# EAGLE board Laptimer (EAGLE 6.3)
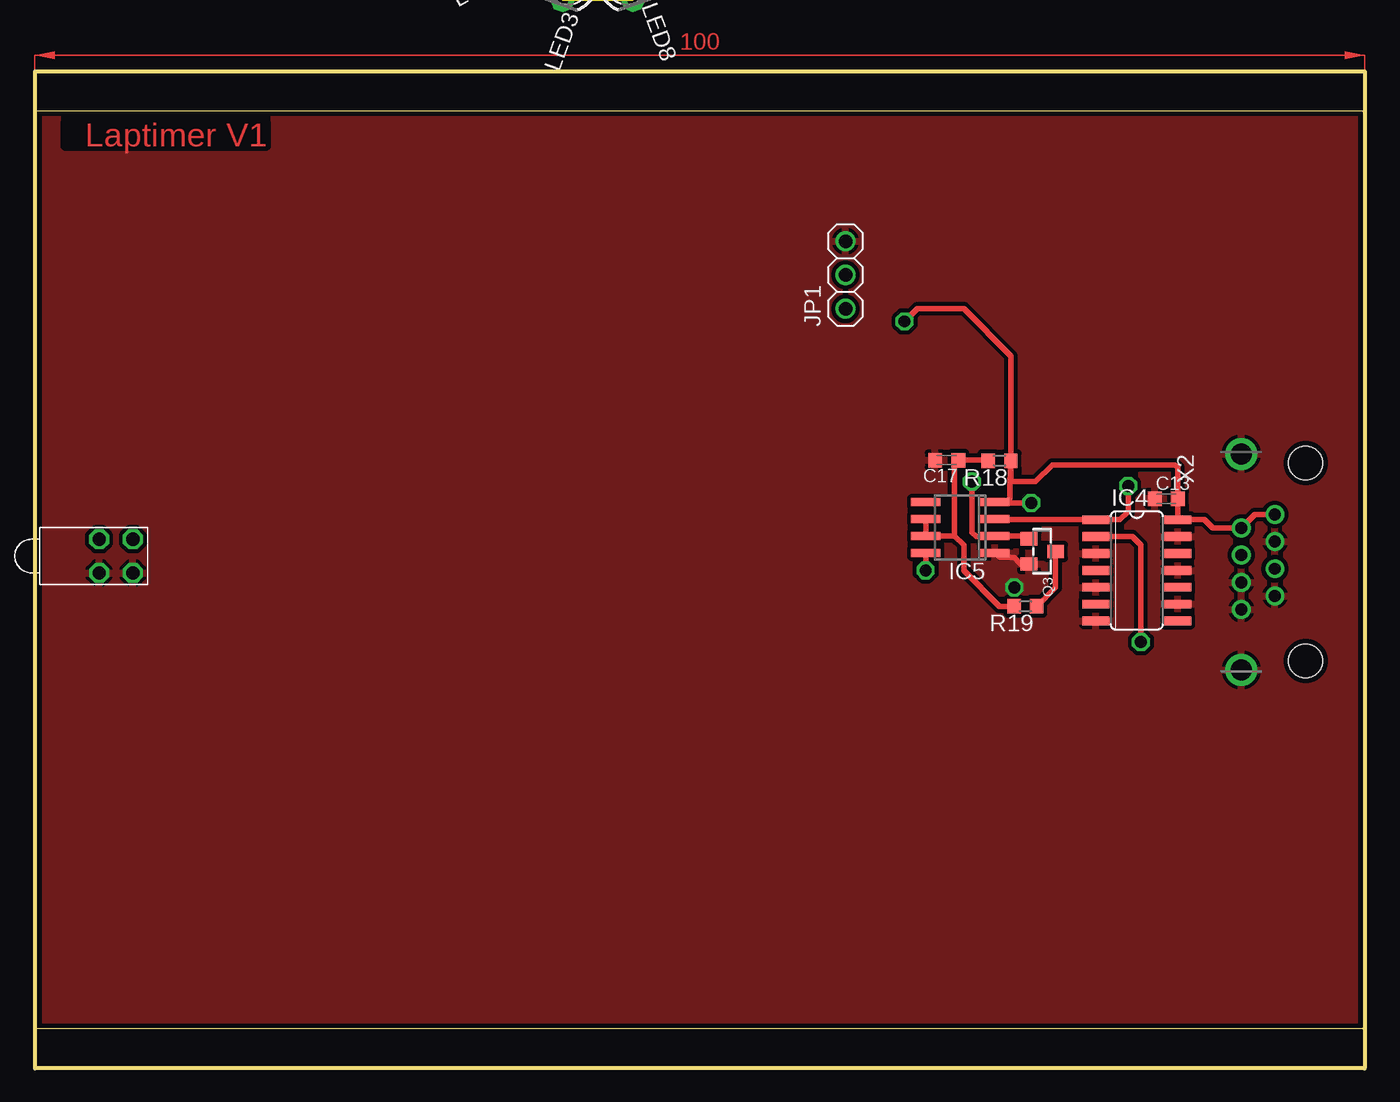
[diagram p0: board, top side]
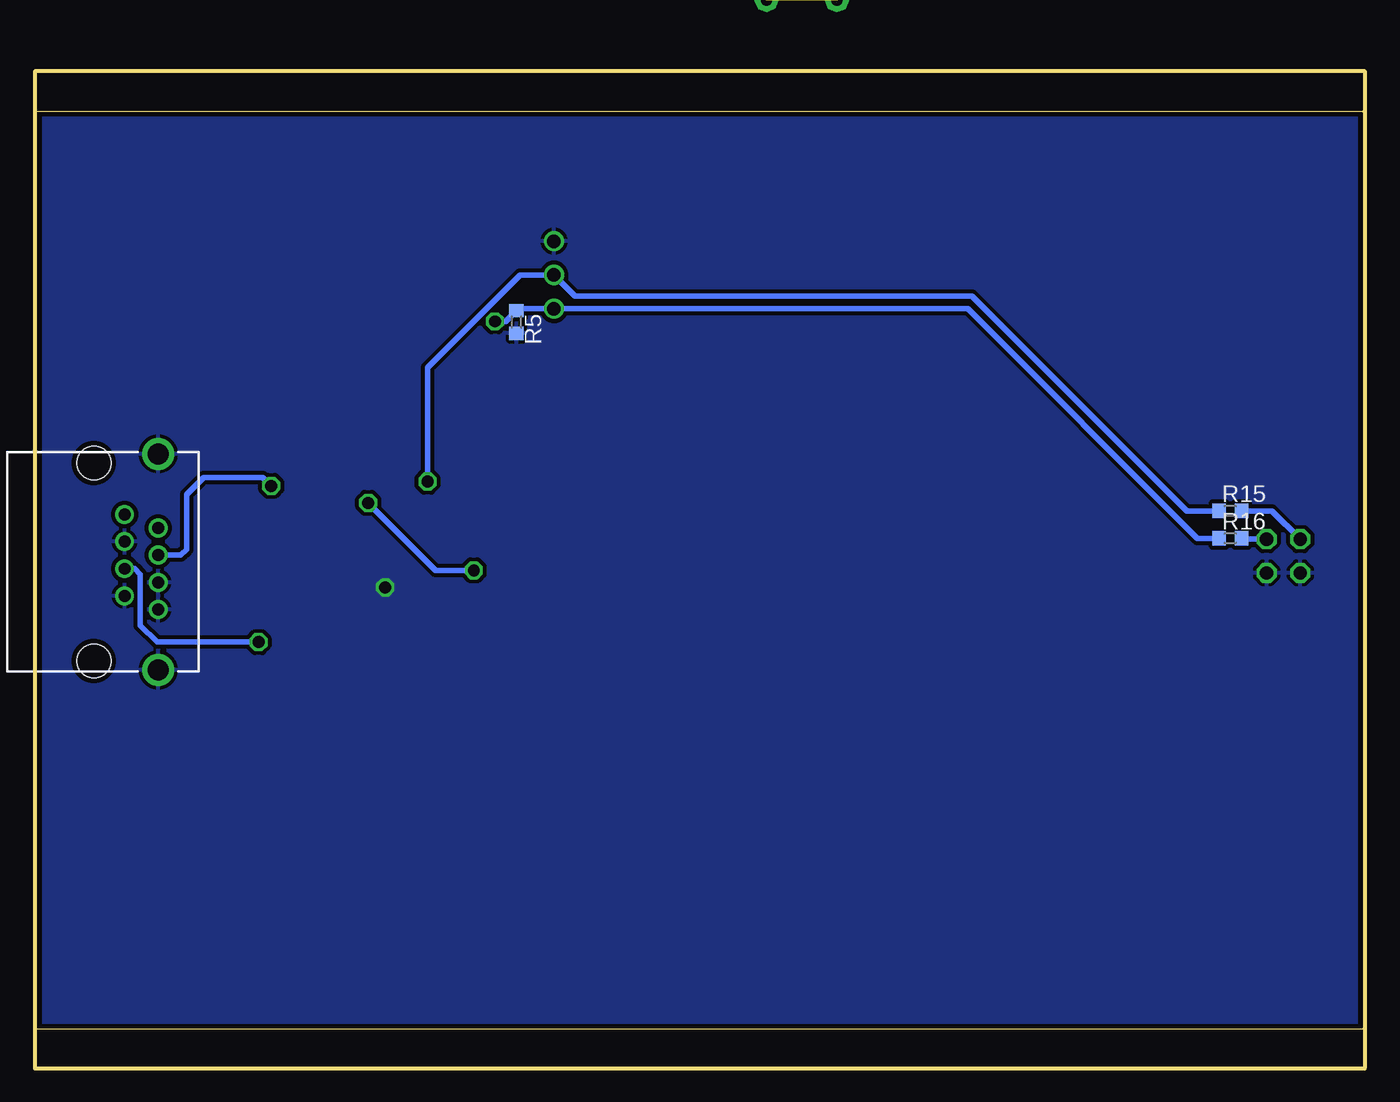
[diagram p1: board, bottom side, seen from below]

Size 100.09 x 75 mm. Coordinates in mm from the lower left corner, seen from the top.
Outline: 0,72 0,75 100,75 100,72
Outline: 0,72 0,3
Outline: 0,3 0,0 100,0 100,3
Outline: 100,72 100,3
Outline: 100,3 0,3
Outline: 100,72 0,72
Copper layers (1*16): Top 0.0356mm / dielectric 1.5011mm / Bottom 0.0356mm
Design rules "LaenPCBOrder *": minimum track width 6mil, minimum drill 13mil, track to track 12mil, track to pad 12mil, pad to pad 12mil, via to via 12mil, smd to smd 12mil, copper to edge 15mil, drill to drill 6mil, minimum pad ring 7mil, minimum via ring 7mil, stop-mask expansion 3mil, vias tented up to drill 0mil, thermal gap 10mil
Holes 9 mm at 42.32,87.94
Holes 0.6 mm at 42.32,87.94

## Footprints (pad centres in the part's own frame; a part is rotated, then mirrored left to right if it is on the bottom)
C0603K = smd 1.05 x 1.08: 1 -0.875,0; 2 0.875,0
SO14 = smd 0.66 x 2.032: 1 -3.81,-3.073; 2 -2.54,-3.073; 3 -1.27,-3.073; 4 0,-3.073; 5 1.27,-3.073; 6 2.54,-3.073; 7 3.81,-3.073; 8 3.81,3.073; 9 2.54,3.073; 10 1.27,3.073; 11 0,3.073; 12 -1.27,3.073; 13 -2.54,3.073; 14 -3.81,3.073
SO08 = smd 0.6 x 2.2: 1 -1.905,-2.6; 2 -0.635,-2.6; 3 0.635,-2.6; 4 1.905,-2.6; 5 1.905,2.6; 6 0.635,2.6; 7 -0.635,2.6; 8 -1.905,2.6
1X03 = drill 1.016: 1 -2.54,0; 2 0,0; 3 2.54,0
1X02_ROUND = drill 1 pad 1.676: 1 -1.27,0; 2 1.27,0
LED3MM = drill 0.813 pad 1.676 octagon: A -1.27,0; K 1.27,0
SOT23-WIDE = smd 1 x 1.27: 1 -0.95,-1; 2 0.95,-1; 3 0,1
R0603 = smd 1 x 1.1: 1 -0.85,0; 2 0.85,0
BI-LEVEL-LED-INDICATOR = drill 1 octagon: ANODE1 1.27,1.27; ANODE2 1.27,-1.27; CATHODE1 -1.27,1.27; CATHODE2 -1.27,-1.27
GLX-S-88M = drill 0.9 pad 1.422: 1 -3.57,-2.3; 2 -2.55,-4.84; 3 -1.53,-2.3; 4 -0.51,-4.84; 5 0.51,-2.3; 6 1.53,-4.84; 7 2.55,-2.3; 8 3.57,-4.84 | drill 1.6 pad 2.184: S1 -8.125,-4.84; S2 8.125,-4.84 | hole 2.55: -7.44,0; 7.44,0

## Placement (x,y rotation side)
C13  100n  [C0603K]  85.09,42.86 0 top
C17  100n  [C0603K]  68.58,45.76 180 top
IC4  74HC04D  [SO14]  82.87,37.47 270 top
IC5  NE555D  [SO08]  69.6,40.7 90 top
JP1  [1X03]  60.96,59.69 90 top
JP2  [1X02_ROUND]  52.7,86.36 270 top  (outside the outline)
JP3  [1X03]  55.24,86.36 270 top  (outside the outline)
LED1  SFH 309  [LED3MM]  35.6,89.22 170 top  (outside the outline)
LED2  SFH 309  [LED3MM]  42.32,94.67 90 top  (outside the outline)
LED3  SFH 309  [LED3MM]  40.1,81.53 250 top  (outside the outline)
LED4  SFH 309  [LED3MM]  48.1,84.44 330 top  (outside the outline)
LED5  SFH 309  [LED3MM]  48.99,89.22 10 top  (outside the outline)
LED6  SFH 309  [LED3MM]  38.16,93.34 130 top  (outside the outline)
LED7  SFH 309  [LED3MM]  36.59,84.43 210 top  (outside the outline)
LED8  SFH 309  [LED3MM]  44.55,81.55 290 top  (outside the outline)
LED9  SFH 309  [LED3MM]  46.67,93.03 50 top  (outside the outline)
Q3  [SOT23-WIDE]  75.76,38.89 270 top
R5  1k  [R0603]  63.79,56.15 270 bottom
R15  220  [R0603]  10.1,41.95 0 bottom
R16  220  [R0603]  10.1,39.88 0 bottom
R18  1k  [R0603]  72.55,45.71 180 top
R19  100  [R0603]  74.49,34.77 180 top
U$19  BI-LEVEL-LED-INDICATOR  [BI-LEVEL-LED-INDICATOR]  6.1,38.54 90 top
X2  GLX-S-88M  [GLX-S-88M]  95.57,38.1 270 top

## Library data of the parts
C13 C17 R5 R15 R16 R18 R19 = rcl
IC4 = 74xx-eu
IC5 = linear
JP1 JP3 LED1-LED9 = adafruit
JP2 Q3 = microbuilder
U$19 = unicorn_v2
X2 = con-kycon; OC_FARNELL: unknown; OC_NEWARK: unknown

## Nets
5.0V: C13.2 IC4.14 IC5.4 IC5.8 JP1.1 R5.1 R16.1 R18.1 X2.1 X2.2
GND: C13.1 C17.2 IC4.3 IC4.5 IC4.7 IC4.9 IC4.11 IC4.13 IC5.1 JP1.3 Q3.2 R5.2 U$19.CATHODE1 U$19.CATHODE2 X2.3 X2.6 X2.7 X2.8 X2.S1 X2.S2
INT: JP3.2 LED1.K LED2.K LED3.K LED4.K LED5.K LED6.K LED7.K LED8.K LED9.K
N$10: JP2.1 JP3.1
N$22: IC4.2 X2.5
N$25: R15.2 U$19.ANODE1
N$32: R16.2 U$19.ANODE2
N$36: C17.1 IC5.6 IC5.7 R18.2 R19.2
N$40: JP2.2 JP3.3 LED1.A LED2.A LED3.A LED4.A LED5.A LED6.A LED7.A LED8.A LED9.A
N$41: Q3.3 R19.1
PT-IN: IC5.2 JP1.2 Q3.1 R15.1
PT-OUT: IC4.1 IC5.3 X2.4

## Tracks (layer width: path | path; a pad name or v marks a point on that pad's centre or on a via)
5.0V  (via drill 0.9)
  Top 0.406: X2.1 91.75,41.67 X2.2 88.57,40.65 87.95,41.27 IC4.14 85.94,42.84 | 85.94,42.84 C13.2 | 85.94,42.84 85.94,45.19 85.72,45.4 76.52,45.4 75.25,44.13 73.41,44.13 | 73.41,44.13 R18.1 73.34,44.07 73.34,42.86 73.08,42.6 IC5.4 72.25,42.55 v74.93,42.55 | IC5.8 v66.99,37.47 | 73.41,44.13 73.41,53.59 69.85,57.15 66.36,57.15 v65.41,56.2
  Bottom 0.406: v66.99,37.47 69.85,37.47 v74.93,42.55 | R16.1 12.58,39.88 29.84,57.15 JP1.1 63.64,57.15 R5.1 64.59,56.2 v65.41,56.2
GND  (via drill 0.9)
  Top 0.406: IC5.1 72.57,38.42 73.66,38.42 74.13,37.94 Q3.2
  other vias: 73.66,36.2
  pour Top: 0,72.33 100.14,72.33 100.14,3.12 0.13,3.12
  pour Bottom: 0,72.33 100.14,72.33 100.14,3.12 0.13,3.12
INT  (9 unrouted)
N$8  (via drill 0.6)
  other vias: 42.32,87.94
N$10  (1 unrouted)
N$22  (via drill 0.9)
  Top 0.406: v83.19,32.07 83.19,39.37 82.55,40.01 IC4.2
  Bottom 0.406: X2.5 92.52,37.59 92.08,37.15 92.08,33.34 90.81,32.07 v83.19,32.07
N$25
  Bottom 0.406: R15.2 6.96,41.95 U$19.ANODE1
N$32
  Bottom 0.406: R16.2 9.18,39.81 U$19.ANODE2
N$36
  Top 0.406: 69.16,40.06 69.85,39.37 69.85,37.47 72.55,34.77 R19.2 | 69.16,40.06 IC5.7 IC5.6 | 69.16,40.06 69.16,45.46 C17.1 71.34,45.76 R18.2
N$40  (10 unrouted)
N$41
  Top 0.406: Q3.3 76.76,36.19 R19.1
PT-IN  (via drill 0.9)
  Top 0.406: Q3.1 74.55,40.06 IC5.2 72.14,40.01 70.8,40.01 70.48,40.32 v70.48,44.13
  Bottom 0.406: R15.1 13.37,41.95 29.53,58.1 59.37,58.1 JP1.2 63.5,59.69 70.48,52.7 v70.48,44.13
PT-OUT  (via drill 0.9)
  Top 0.406: v82.23,43.81 82.23,41.91 81.6,41.27 IC4.1 72.25,41.27 IC5.3
  Bottom 0.406: X2.4 89.03,38.61 88.58,39.05 88.58,43.18 87.31,44.45 82.87,44.45 v82.23,43.81
(copper drawn outside any net)
  shapes: Top area x3

## Text on the board
Top: Laptimer V1